# Altium PCB R3Change.PcbDoc
Units mm, origin at the board's own origin, x right, y up, seen from the top; angles counter-clockwise.
Board outline 200.25 x 100.25 mm, 2 copper layers (Top Layer, Bottom Layer); 47 components, 19 nets, 104 pads, 4 vias.
Unrouted connection lines stored in the file: 87.
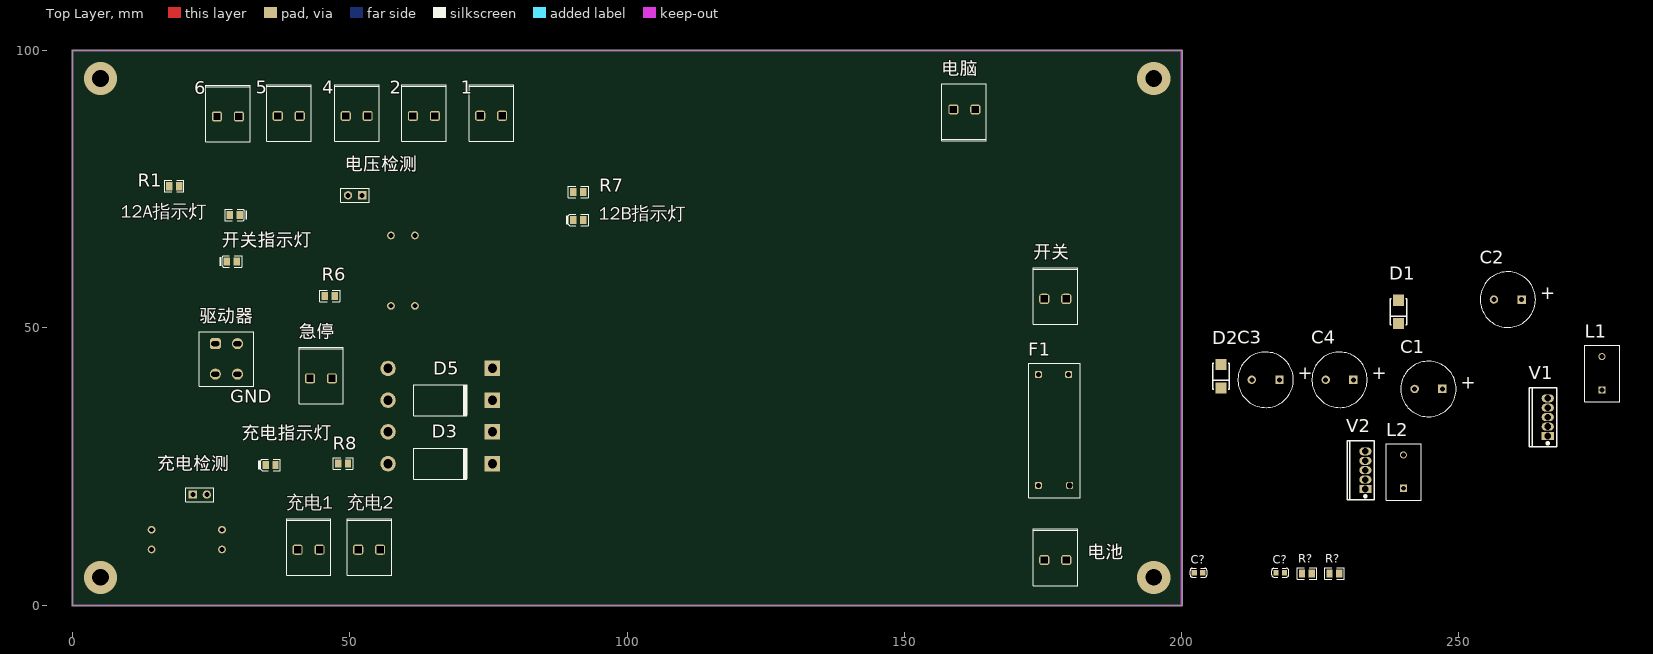
[diagram p0: Top Layer view]
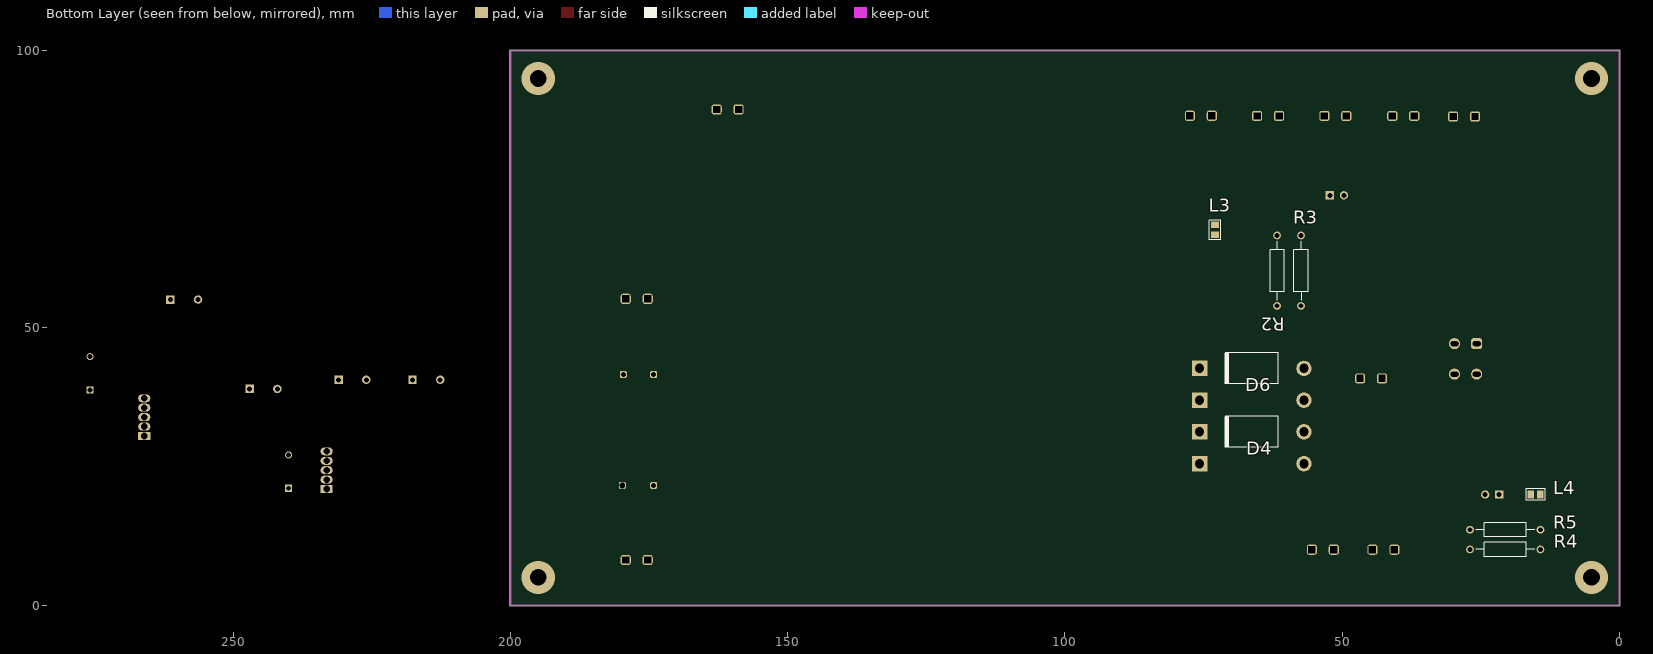
[diagram p1: Bottom Layer view, seen from below]

## Layer stack, top to bottom
Top Solder: solder mask 0.0102, Solder Resist, Dk 3.5
Top Layer: signal copper 0.0356
Dielectric 1: dielectric 0.32, FR-4, Dk 4.8
Bottom Layer: signal copper 0.0356
Bottom Solder: solder mask 0.0102, Solder Resist, Dk 3.5

## Board outline
0,-0.127 cw(c0,0) -0.127,0 -0.127,100 cw(c0,100) 0,100.127 200,100.127 cw(c200,100) 200.127,100 200.127,0 cw(c200,0) 200,-0.127

## Design rules (kind name [scope] priority, off if disabled: settings)
Clearance [All] p1: gap=0.203 ignorepadtopadclearanceinfootprint=FALSE
PolygonConnect [All] p1: connectstyle=Direct reliefconductorwidth=0.254 reliefentries=4 polygonreliefangle="90 Angle" airgapwidth=0.254
RoutingVias [All] p1: holewidth=0.711 width=1.27 viastyle="Through Hole" minholewidth=0.711 minwidth=1.27 maxholewidth=0.711 maxwidth=1.27
SolderMaskExpansion [All] p1: expansion=0.102
Width [All] p1: maxlimit=2.54 minlimit=0.254 preferedwidth=0.762
30 further rules are at their usual default settings.

## Components (designator, comment, footprint, x,y, rotation, side; value= is the part's Value field where it differs from the comment)
1 "Header 2" VH-2A 73.491,88.274 r0 top
2 "Header 2" VH-2A 61.363,88.235 r0 top
4 "Header 2" VH-2A 49.234,88.235 r0 top
5 "Header 2" VH-2A 36.978,88.235 r0 top
6 "Header 2" VH-2A 26.012,88.138 r0 top
12A指示灯 "红灯 0805" LC-0805_LED_S1 29.21,70.358 r180 top
12B指示灯 "红灯 0805" LC-0805_LED_S1 91.186,69.469 r0 top
C1 "Cap" Cap_5.0 247.062,38.989 r0 top value=220uF/50V
C2 "Cap" Cap_5.0 261.366,55.118 r0 top value=1000uF/25V
C3 "Cap" Cap_5.0 217.678,40.64 r0 top value=220uF/50V
C4 "Cap" Cap_5.0 231.013,40.64 r0 top value=1000uF/25V
C? "1uF (105) 10% 50V" LC-0603_C 217.805,5.842 r0 top
C? "1uF (105) 10% 50V" LC-0603_C 203.073,5.842 r0 top
D1 "SS54" LC-SMA(DO-214AC)_S1 239.141,52.891 r90 top
D2 "SS54" LC-SMA(DO-214AC)_S1 207.137,41.275 r90 top
D3 "Diode 1N5408" DO-201AD 66.294,25.506 r0 top
D4 "Diode 1N5408" DO-201AD 66.294,31.26 r0 bottom
D5 "Diode 1N5408" DO-201AD 66.294,36.975 r0 top
D6 "Diode 1N5408" DO-201AD 66.294,42.69 r0 bottom
F1 "Fuse" Fuse 179.832,21.59 r90 top
L1 "33uH" Inductor 275.844,38.831 r270 top
L2 "33uH" Inductor 240.03,21.082 r270 top
L3 "47uH ±10%" LC-0805_L 72.898,67.691 r270 bottom
L4 "47uH ±10%" LC-0805_L 15.112,19.939 r180 bottom
R1 "15KΩ (1502) ±1%" LC-0805_R 18.288,75.565 r180 top
R2 "Res Semi" AXIAL-0.5 61.722,60.325 r90 bottom value=10K
R3 "Res Semi" AXIAL-0.5 57.404,60.325 r270 bottom value=100K
R4 "Res Semi" AXIAL-0.5 20.574,10.033 r180 bottom value=10K
R5 "Res Semi" AXIAL-0.5 20.574,13.589 r0 bottom value=100K
R6 "33KΩ (3302) ±1%" LC-0805_R 46.355,55.753 r0 top
R7 "15KΩ (1502) ±1%" LC-0805_R 91.186,74.549 r0 top
R8 "62KΩ (6202) ±1%" LC-0805_R 48.768,25.527 r0 top
R? "3KΩ (3001) ±1%" LC-0805_R 222.631,5.715 r0 top
R? "27KΩ (2702) ±1%" LC-0805_R 227.584,5.715 r0 top
V1 "LM2596" LC-TO-220-5 266.065,33.909 r90 top
V2 "LM2596" LC-TO-220-5 233.172,24.335 r90 top
充电1 "Header 2" VH-2A 40.564,10.003 r0 top
充电2 "Header 2" VH-2A 51.486,10.003 r0 top
充电指示灯 "红灯 0805" LC-0805_LED_S1 35.687,25.273 r0 top
充电检测 "Header 2" HDR1X2 21.653,19.939 r0 top
开关 "Header 2" VH-2A 175.26,55.245 r0 top
开关指示灯 "红灯 0805" LC-0805_LED_S1 28.702,61.976 r0 top
急停 "Header 2" VH-2A 42.799,40.894 r0 top
电压检测 "Header 2" HDR1X2 52.197,73.914 r180 top
电池 "Header 2" VH-2A 175.26,8.128 r0 top
电脑 "Header 2" VH-2A 162.814,89.408 r180 top
驱动器 "插座" "HEADER 2X2" 22.818,39.506 r0 top

## Footprints (in the part's own frame and the unit in brackets; to place one, negate y for a bottom-side part, rotate by r counter-clockwise, add the part's x,y. Pads: shape width x height; smd on the part's side, far side on the other; paste and mask are expansions set on the pad)
AXIAL-0.5 [mm] "Axial Device, Thru-Hole; 2 Leads; 0.5 in Pin Spacing"
  round 1.4 hole 0.85: 1(-6.35,0) 2(6.35,0)
  silkscreen extent -5.33,-1.27 5.33,1.27
Cap_5.0 [mil]
  rect 60x60 hole 35.43: 1(0,0)
  round 60 hole 35.43: 2(-196.85,0)
  silkscreen extent -295,-197 98,197
DO-201AD [mm] "Diode, Axial; Body 9.5 x 5.6 mm (LxDia. max), Lead Dia. 1.32 mm (max)"
  round 2.8 hole 1.7: 1(-9.42,0)
  rect 2.8x2.8 hole 1.7: 2(9.42,0)
  silkscreen extent -4.8,-2.8 4.9,2.8
Fuse [mil] "直插保险丝夹"
  rrect50% 50x50 hole 35: 1(0,222.83) 2(787.4,7) 2(787.4,222.83)
  rrect50% 50x50 hole 35 slot 39.37 at 0 deg: 1(0,0)
  silkscreen extent -89,-75 868,291
HDR1X2 [mm] "Connector; Header; 2 Position"
  rect 1.5x1.5 hole 0.9: 1(0,0)
  round 1.5 hole 0.9: 2(2.54,0)
  silkscreen extent -1.27,-1.27 3.81,1.27
"HEADER 2X2" [mm] "Header 2X2"
  rrect50% 2x2 hole 0.9 slot 1.45 at 0 deg: 1(2.9,7.65)
  round 2 hole 0.9 slot 1.45 at 0 deg: 2(2.9,2.15) 3(6.9,7.65) 4(6.9,2.15)
  silkscreen extent 0,0 9.8,9.8
Inductor [mil]
  rect 50x50 hole 35: 1(0,0)
  round 50 hole 35: 2(-236.22,0)
  silkscreen extent -315,-121 85,128
LC-0603_C [mm]
  rect 0.93x0.98 smd: 1(-0.77,0) 2(0.77,0)
  silkscreen extent -1.53,-0.79 1.54,0.79, body extent -0.8,-0.4 0.8,0.4, height 0.3
LC-0805_L [mm]
  rect 1.16x1.47 smd: 1(-0.89,0) 2(0.89,0)
  silkscreen extent -1.77,-1.04 1.77,1.03, body extent -1,-0.64 1,0.64, height 0.6
LC-0805_LED_S1 [mm]
  rect 1.16x1.47 smd: A(0.89,0) K(-0.89,0)
  silkscreen extent -2.25,-1.04 1.77,1.03, body extent -1.01,-0.62 1.01,0.62, height 1.1
LC-0805_R [mm]
  rect 1.16x1.47 smd: 1(-0.89,0) 2(0.89,0)
  silkscreen extent -1.77,-1.04 1.77,1.04, body extent -1,-0.62 1,0.63, height 0.49
LC-SMA(DO-214AC)_S1 [mm]
  rect 2x2 smd: 1(2.1,0) 2(-2.1,0)
  silkscreen extent -2.35,-1.5 2.35,1.5
LC-TO-220-5 [mm]
  rect 1.45x2.2 hole 1.2 mask+0.051: 1(-3.4,0)
  oval 1.45x2.2 hole 1.2 mask+0.051: 2(-1.7,0) 3(0,0) 4(1.7,0) 5(3.4,0)
  silkscreen extent -5.3,-1.6 5.3,3.3
VH-2A [mm] "Header 2 use for Power"
  rrect50% 1.84x1.84 hole 1.24 square: 1(0,0) 2(3.96,0)
  silkscreen extent -1.98,-4.6 6.02,5.61

## Part data
1 2 4 5 6 充电1 充电2 开关 急停 电池 电脑: "贴片2p座"
12A指示灯 12B指示灯 充电指示灯 开关指示灯: library part "0805 红灯", "发光二极管", Package=0805, SuppliersPartNumber=C2295, ComponentLink1Description=供应商链接, ComponentLink1URL=http://www.szlcsc.com/product/details_2668.html, Supplier=LC
C1 C2 C3 C4: library part Cap_DIP, "Cap_DIP"
C? C?: library part "0603 1uF (105) 10% 50V", "贴片电容", Package=0603, SuppliersPartNumber=C15849, ComponentLink1Description=供应商链接, ComponentLink1URL=http://www.szlcsc.com/product/details_16531.html, Supplier=LC
D1 D2: library part "SMA(DO-214AC) SS54", "二极管", Package=SMA(DO-214AC), SuppliersPartNumber=C22452, ComponentLink1Description=供应商, ComponentLink1URL=http://www.szlcsc.com/product/details_23178.html, Supplier=LC
D3 D4 D5 D6: "3 Amp Medium Power Silicon Rectifier Diode", ComponentLink1Description="Manufacturer Link", ComponentLink1URL=http://www.irf.com/, DatasheetVersion=Aug-1984, LatestRevisionDate=17-Jul-2002, LatestRevisionNote="Re-released for DXP Platform.", PackageDescription="Diode, Axial; Body 9.5 x 5.3 mm (LxDia. max), Lead Dia. 1.32 mm (max)", PackageReference=DO-201AD, Published=8-Jun-2000, Publisher="Altium Limited"
F1: library part FUSE, "Fuse-DIP"
L1 L2: library part Inducotor
L3 L4: library part "0805 47uH 10%", "贴片电感", Package=0805, SuppliersPartNumber=C14304, ComponentLink1Description=供应商链接, ComponentLink1URL=http://www.szlcsc.com/product/details_14964.html, Supplier=LC
R1 R7: library part "0805 15KΩ (1502) 1%", "贴片电阻", Package=0805, SuppliersPartNumber=C17475, ComponentLink1Description=供应商链接, ComponentLink1URL=http://www.szlcsc.com/product/details_18163.html, Supplier=LC
R2 R3 R4 R5: "Semiconductor Resistor", LatestRevisionDate=17-Jul-2002, LatestRevisionNote="Re-released for DXP Platform.", PackageDescription="Axial Device, Thru-Hole; 2 Leads; 0.5 in Pin Spacing", PackageReference=AXIAL-0.5, Published=8-Jun-2000, Publisher="Altium Limited"
R6: library part "0805 33KΩ (3302) 1%", "贴片电阻", Package=0805, SuppliersPartNumber=C17633, ComponentLink1Description=供应商链接, ComponentLink1URL=http://www.szlcsc.com/product/details_18321.html, Supplier=LC
R8: library part "0805 62KΩ (6202) 1%", "贴片电阻", Package=0805, SuppliersPartNumber=C17783, ComponentLink1Description=供应商链接, ComponentLink1URL=http://www.szlcsc.com/product/details_18471.html, Supplier=LC
R?: library part "0805 3KΩ (3001) 1%", "贴片电阻", Package=0805, SuppliersPartNumber=C17661, ComponentLink1Description=供应商链接, ComponentLink1URL=http://www.szlcsc.com/product/details_18349.html, Supplier=LC
R?: library part "0805 27KΩ (2702) 1%", "贴片电阻", Package=0805, SuppliersPartNumber=C17593, ComponentLink1Description=供应商链接, ComponentLink1URL=http://www.szlcsc.com/product/details_18281.html, Supplier=LC
V1 V2: "Power Chip"
充电检测 电压检测: "Header, 2-Pin", LatestRevisionDate=17-Jul-2002, LatestRevisionNote="Re-released for DXP Platform.", Publisher="Altium Limited"
驱动器: library part HEADER_2X2

## Via types
v1: diameter 6, hole 3, Top Layer to Bottom Layer, 4 vias

## Nets (pads, with @x,y where several pads share a name; then routed paths per layer and width w, separated by ;. In a path a pad name is that pad's centre, name@x,y a point inside that pad or via, vN(x,y) a via of type N, cw(c..) or ccw(c..) an arc to the next point about the centre after c; other vN are vias at no path point)
+12_A: 1.2 2.2 4.2 5.2 6.2 C2.1 L1.2 R1.1 V1.4
+12_B: C4.1 L2.2 R7.1 V2.4 电脑.2
+24: C1.1 C3.1 R3.2 R6.2 V1.1 V2.1 开关.1 急停.2
+24_Bat: F1.2 开关.2
Battery+: D3.2 D4.2 D5.2 D6.2 F1.1 电池.2
GND: 1.1 2.1 4.1 5.1 6.1 12A指示灯.K 12B指示灯.K C1.2 C2.2 C3.2 C4.2 C?.1 D1.1 D2.1 R2.1 R4.1 V1.3 V1.5 V2.3 V2.5 充电1.1 充电2.1 充电指示灯.K 充电检测.2 开关指示灯.K 电压检测.2 电池.1 电脑.1 驱动器.2 驱动器.4
  other v1: 5,5 195,5 5,95 195,95
Net12A指示灯_A: 12A指示灯.A R1.2
Net12B指示灯_A: 12B指示灯.A R7.2
NetC?_2: C?.2@218.575,5.842 L3.2 R2.2 R3.1
NetC?_2: C?.2@203.843,5.842 L4.2 R4.2 R5.1
NetD1_2: D1.2 L1.1 V1.2
NetD2_2: D2.2 L2.1 V2.2
NetD3_1: D3.1 D4.1 D5.1 D6.1 R5.2 R8.2 充电1.2 充电2.2
NetL3_1: L3.1 电压检测.1
NetL4_1: L4.1 充电检测.1
NetR6_1: R6.1 开关指示灯.A
NetR8_1: R8.1 充电指示灯.A
NetR?_1: R?.1@226.694,5.715 R?.2@223.521,5.715
驱动: 急停.1 驱动器.1 驱动器.3
pads on no net: R?.1@221.741,5.715 R?.2@228.474,5.715

## Keep-outs
Keep-Out Layer:
  lines w0.254: 0,0 0,100 200,100 200,0 0,0

## Silkscreen, mask and mechanical layers (free items; w line width, h text height)
Top Overlay:
  text "GND" at 28.448,35.687 h4.06

## Text inside footprints (layer, text, board x,y; h text height)
C1: Top Overlay "+" at 250.389,38.252 h4.06
C2: Top Overlay "+" at 264.693,54.381 h4.06
C3: Top Overlay "+" at 221.005,39.903 h4.06
C4: Top Overlay "+" at 234.34,39.903 h4.06